# EAGLE board Senior Design Board V2.3 (EAGLE 9.3.2)
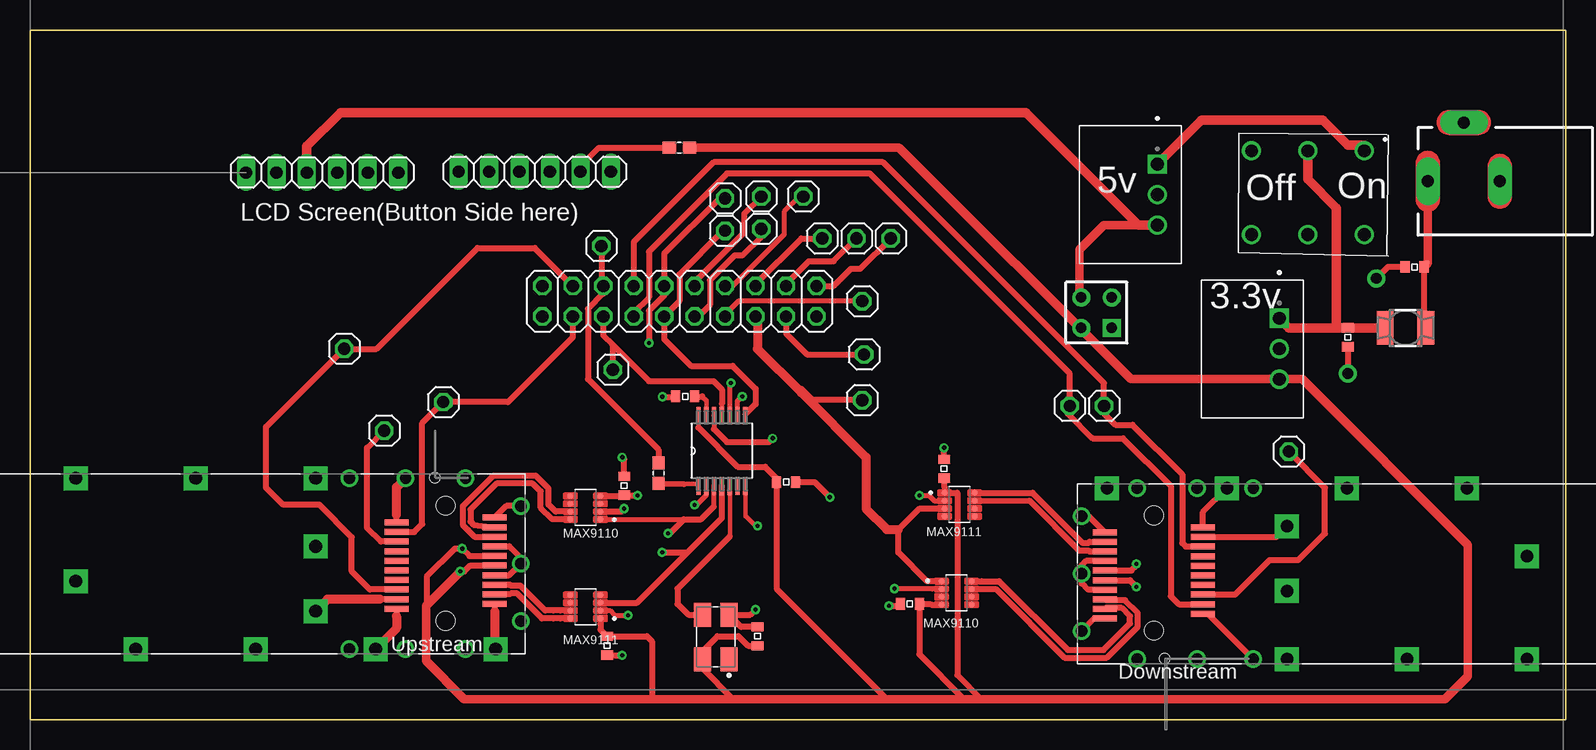
[diagram p0: board, top side]
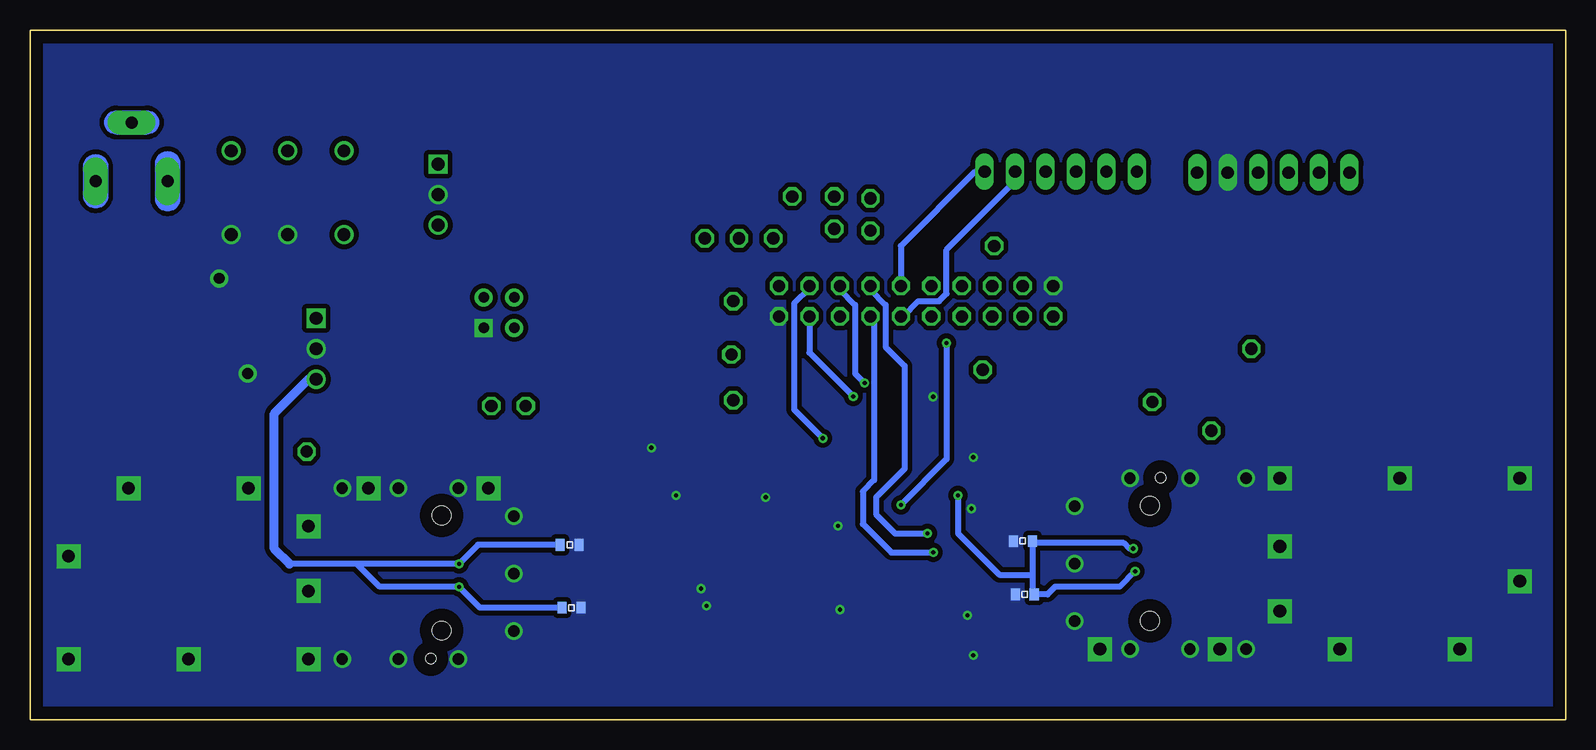
[diagram p1: board, bottom side, seen from below]

Size 128 x 57.5 mm. Coordinates in mm from the lower left corner, seen from the top.
Outline: 0,57.5 0,0 128,0 128,57.5 0,57.5
Copper layers (1*16): Top 0.035mm / dielectric 1.5mm / Bottom 0.035mm
Design rules "default *": minimum track width 10mil, minimum drill 0.61mm, track to track 8mil, track to pad 8mil, pad to pad 8mil, via to via 8mil, smd to smd 8mil, copper to edge 40mil, drill to drill 8mil, minimum pad ring 0mil, minimum via ring 8mil, stop-mask expansion 4mil, vias tented up to drill 14mil, thermal gap 10mil
Net classes: 0 default: width 0.5 mm, clearance 0.15 mm; 1 Diff: width 0.5 mm, clearance 0.127 mm

## Footprints (pad centres in the part's own frame; a part is rotated, then mirrored left to right if it is on the bottom)
0603 = smd 0.762 x 0.965: 1 -0.787,0; 2 0.787,0
0603_C2 = smd 0.762 x 0.965: 1 -0.787,0; 2 0.787,0
0603_C6 = smd 0.762 x 0.965: 1 -0.787,0; 2 0.787,0
0603_C19 = smd 0.762 x 0.965: 1 -0.787,0; 2 0.787,0
1X01 = drill 1.016 pad 1.524 octagon: 1 0,0
4840-2211 = drill 1 pad 2 long: 1 3,1.7; 2 -3,1.7; 3 0,-3.2
HDR-2X2 = drill 0.9 pad 1.5 square: 1 -1.27,-1.27 | drill 0.9 pad 1.5: 2 -1.27,1.27; 3 1.27,-1.27; 4 1.27,1.27
1X06 = drill 1.016 pad 1.524 long: 1 -6.35,0; 2 -3.81,0; 3 -1.27,0; 4 1.27,0; 5 3.81,0; 6 6.35,0
2X10 = drill 1.016 pad 1.524 octagon: 1 -11.43,-1.27; 2 -11.43,1.27; 3 -8.89,-1.27; 4 -8.89,1.27; 5 -6.35,-1.27; 6 -6.35,1.27; 7 -3.81,-1.27; 8 -3.81,1.27; 9 -1.27,-1.27; 10 -1.27,1.27; 11 1.27,-1.27; 12 1.27,1.27; 13 3.81,-1.27; 14 3.81,1.27; 15 6.35,-1.27; 16 6.35,1.27; 17 8.89,-1.27; 18 8.89,1.27; 19 11.43,-1.27; 20 11.43,1.27
MS50 = smd 2.8 x 1.4: 1 0,-1.7; 2 0,1.7
PAD = drill 0.9 pad 1.5: 1 0,0
RESC1608X55 = smd 1.1 x 1: 1 -0.85,0; 2 0.85,0
RESC1608X55_R2 = smd 1.1 x 1: 1 -0.85,0; 2 0.85,0
P137 = drill 1.06 pad 1.59: 2 3.651,5.143; 2_1 3.651,-4.255; 3 -3.334,5.143; 3_1 -3.334,0.444; 3_2 -3.334,-4.255; 3_3 3.651,0.444
SOP65P640X120-14N = smd 1.473 x 0.356: 1 -2.921,1.956; 2 -2.921,1.295; 3 -2.921,0.66; 4 -2.921,0; 5 -2.921,-0.66; 6 -2.921,-1.295; 7 -2.921,-1.956; 8 2.921,-1.956; 9 2.921,-1.295; 10 2.921,-0.66; 11 2.921,0; 12 2.921,0.66; 13 2.921,1.295; 14 2.921,1.956
SOT65P280X145-8N = smd 0.48 x 0.48: 1 -1.255,0.975; 2 -1.255,0.325; 3 -1.255,-0.325; 4 -1.255,-0.975; 5 1.255,-0.975; 6 1.255,-0.325; 7 1.255,0.325; 8 1.255,0.975
CONV_R-78B15-2.0 = drill 1.06 pad 1.59 square: 1 0,0 | drill 1.06 pad 1.59: 2 2.54,0; 3 5.08,0
P159 = smd 2 x 0.5: 1 10.094,3.513; 2 10.094,2.713; 3 10.094,1.913; 4 10.094,1.113; 5 10.094,0.313; 6 10.094,-0.487; 7 10.094,-1.287; 8 10.094,-2.087; 9 10.094,-2.887; 10 10.094,-3.687; 11 18.294,-3.287; 12 18.294,-2.487; 13 18.294,-1.687; 14 18.294,-0.887; 15 18.294,-0.087; 16 18.294,0.713; 17 18.294,1.513; 18 18.294,2.313; 19 18.294,3.113; 20 18.294,3.913 | drill 1.05 pad 2 square: S1 -16.64,7.196; S2 -6.64,7.196; S3 3.36,7.196; S5 18.36,-7.054; S6 8.36,-7.054; S7 -1.64,-7.054; S8 -11.64,-7.054; S9 -16.64,-1.384; S10 3.36,-3.884; S11 3.36,1.516 | drill 0.95 pad 1.458: S12 6.16,7.196; S13 10.86,7.196; S14 15.86,7.196; S15 20.46,4.871; S16 20.46,0.071; S17 20.46,-4.729; S18 15.86,-7.054; S19 10.86,-7.054; S20 6.16,-7.054 | hole 0.85: 13.294,7.243 | hole 1.55: 14.194,4.913; 14.194,-4.687
P17 = smd 2 x 0.5: 1 -13.823,-2.554; 2 -13.823,-1.754; 3 -13.823,-0.954; 4 -13.823,-0.154; 5 -13.823,0.646; 6 -13.823,1.446; 7 -13.823,2.246; 8 -13.823,3.046; 9 -13.823,3.846; 10 -13.823,4.646; 11 -22.023,4.246; 12 -22.023,3.446; 13 -22.023,2.646; 14 -22.023,1.846; 15 -22.023,1.046; 16 -22.023,0.246; 17 -22.023,-0.554; 18 -22.023,-1.354; 19 -22.023,-2.154; 20 -22.023,-2.954 | drill 1.05 pad 2 square: S1 13.164,-6.332; S2 3.164,-6.332; S3 -6.836,-6.332; S5 -21.836,7.918; S6 -11.836,7.918; S7 -1.836,7.918; S8 8.164,7.918; S9 13.164,2.248; S10 -6.836,4.748; S11 -6.836,-0.652 | drill 0.95 pad 1.458: S12 -9.636,-6.332; S13 -14.336,-6.332; S14 -19.336,-6.332; S15 -23.935,-4.007; S16 -23.935,0.793; S17 -23.935,5.593; S18 -19.336,7.918; S19 -14.336,7.918; S20 -9.636,7.918 | hole 0.85: -17.023,-6.284 | hole 1.55: -17.923,-3.954; -17.923,5.646
TWETMCJANF-10.000000 = smd 2 x 1.4: 1 -1.85,-1.1; 2 1.85,-1.1; 3 1.85,1.1; 4 -1.85,1.1

## Placement (x,y rotation side)
C1  .1uf  [0603]  60.64,6.94 270 top
C2  1uF  [0603_C2]  54.61,26.95 180 top
C3  100nF  [0603]  48.1,6.16 90 top
C4  10uF  [0603_C2]  115.42,37.74 0 top
C5  4.7uF  [0603]  109.86,31.88 90 top
C6  100nF  [0603_C6]  63.03,19.8 0 top
C11  100nF  [0603]  76.2,20.91 270 top
C14  100nF  [0603_C2]  73.35,9.64 0 top
C18  100nF  [0603]  49.53,19.49 90 top
C19  100nF  [0603_C19]  45.24,14.88 0 bottom
C20  100nF  [0603_C19]  45.08,10.44 0 bottom
C21  100nF  [0603_C19]  83.02,14.56 0 bottom
C22  100nF  [0603_C19]  82.86,9.33 0 bottom
GPIO_SPARE1  1X01  [1X01]  34.45,26.47 0 top
GPIO_SPARE2  1X01  [1X01]  26.19,30.92 0 top
GPIO_SPARE3  1X01  [1X01]  86.68,26.15 0 top
GPIO_SPARE4  1X01  [1X01]  89.53,26.15 0 top
J1  4840-2211  [4840-2211]  119.52,46.59 180 top
J3  HDR-2X2  [HDR-2X2]  88.9,33.93 90 top
JP3  1X06  [1X06]  24.35,45.62 0 top
JP4  1X06  [1X06]  42.07,45.68 0 top
JP5  2X10  [2X10]  54.13,34.88 0 top
JP10  1X01  [1X01]  29.53,24.09 0 top
JP11  1X01  [1X01]  104.93,22.34 0 top
L1  10uH  [MS50]  114.66,32.66 90 top
PAD63  PAD  [PAD]  109.86,28.85 0 top
PAD80  PAD  [PAD]  112.24,36.79 0 top
R1  1k  [RESC1608X55]  52.39,20.54 270 top
R2  1k  [RESC1608X55_R2]  54.13,47.69 0 top
SW1  DEV_SW1  [P137]  106.97,43.77 90 top
TDC  TDC72007201PW  [SOP65P640X120-14N]  57.68,22.41 90 top
TESTPIN5  1X01  [1X01]  48.58,29.17 0 top
TESTPIN6  1X01  [1X01]  47.62,39.49 0 top
TP9  1X01  [1X01]  57.94,40.76 0 top
TP10  1X01  [1X01]  57.94,43.46 0 top
TP11  1X01  [1X01]  60.96,40.92 0 top
TP12  1X01  [1X01]  60.96,43.62 0 top
TP13  1X01  [1X01]  69.37,34.88 0 top
TP14  1X01  [1X01]  64.45,43.62 0 top
TP15  1X01  [1X01]  69.37,26.63 0 top
TP16  1X01  [1X01]  66.04,40.12 0 top
TP18  1X01  [1X01]  68.9,40.12 0 top
TP20  1X01  [1X01]  71.75,40.12 0 top
TP_17  1X01  [1X01]  69.53,30.44 0 top
U1  MAX9110EKA+T  [SOT65P280X145-8N]  46.31,17.67 180 top
U2  MAX9110EKA+T  [SOT65P280X145-8N]  77.24,10.56 0 top
U3  MAX9111EKA+T  [SOT65P280X145-8N]  46.31,9.41 180 top
U4  MAX9111EKA+T  [SOT65P280X145-8N]  77.49,17.92 0 top
U5  R-78B3.3-2.0  [CONV_R-78B15-2.0]  104.14,33.46 270 top
U6  R-78B3.3-2.0  [CONV_R-78B15-2.0]  93.98,46.31 270 top
U7  DEV_U7  [P159]  20.45,12.92 0 top
U8  DEV_U8  [P17]  111.61,11.37 0 top
U$2  REF_CLK_10MHZ  [TWETMCJANF-10.000000]  57.16,6.89 90 top

## Library data of the parts
C1-C6 C11 C14 C18-C22 GPIO_SPARE1-GPIO_SPARE4 J3 JP3-JP5 JP10 JP11 PAD63 PAD80 SW1 TDC TESTPIN5 TESTPIN6 TP9-TP16 TP18 TP20 TP_17 U3 U4 U7 U8 U$2 = common
J1 = common; DATASHEET: http://datasheets.diptrace.com/con_power/typ_4840.2211.pdf
L1 = common; OC_FARNELL: unknown; OC_NEWARK: unknown
R1 R2 = common; AVAILABILITY: Unavailable; DESCRIPTION: Res Smd 0.047 Ohm 1% 0.4w 0603; MF: Vishay Dale; MP: WSLP0603R0470FEB; PACKAGE: 0603 Vishay Dale; PRICE: None
U1 U2 = common; AVAILABILITY: Unavailable; DESCRIPTION: Single/Dual Lvds Line Driver With u; MF: Maxim Integrated; MP: MAX9110EKA+T; PACKAGE: SOT-23 Maxim Integrated; PRICE: None
U5 U6 = common; AVAILABILITY: Unavailable; DESCRIPTION: Switching Regulator 4.75-32Vin 3.3Vo 2A; MF: Recom Power; MP: R-78B3.3-2.0; PACKAGE: SIP-3 Recom Power; PRICE: None

## Nets
3.3_V: C1.2 C3.2 C6.1 C11.2 C14.2 C18.1 C19.2 C20.2 C21.1 C22.1 J3.2 R2.2 TDC.14 U1.4 U2.4 U3.1 U4.1 U5.3 U7.15 U7.16 U8.15 U8.16 U$2.4
12V: C5.2 L1.2 SW1.3_3 U5.1
+5V: J3.4 JP3.3 U6.3
CLOCK: TDC.5 U$2.3
I2C_SCL: JP4.6 JP5.12 TP12.1
I2C_SDA: JP4.5 JP5.11 R2.1 TP11.1
N$4: C2.1 TDC.13
N$22: C4.2 J1.1 L1.1
NET_0: SW1.2_1 U6.1
NET_35: JP5.20 TP20.1
POWER_GROUND: C1.1 C2.2 C3.1 C4.1 C5.1 C6.2 C11.1 C14.1 C18.2 C19.1 C20.1 C21.2 C22.2 J1.2 J1.3 J3.1 JP3.5 JP5.2 JP5.19 PAD63.1 PAD80.1 SW1.3_1 SW1.3_2 TDC.7 U1.2 U2.2 U3.2 U4.2 U5.2 U6.2 U7.1 U7.9 U7.10 U7.11 U7.14 U7.17 U7.20 U7.S1 U7.S2 U7.S3 U7.S5 U7.S6 U7.S7 U7.S8 U7.S9 U7.S10 U7.S11 U7.S12 U7.S13 U7.S14 U7.S15 U7.S16 U7.S17 U7.S18 U7.S19 U7.S20 U8.1 U8.9 U8.10 U8.11 U8.14 U8.17 U8.20 U8.S1 U8.S2 U8.S3 U8.S5 U8.S6 U8.S7 U8.S8 U8.S9 U8.S10 U8.S11 U8.S12 U8.S13 U8.S14 U8.S15 U8.S16 U8.S17 U8.S18 U8.S19 U8.S20 U$2.2
RD_DOWN_N [Diff]: U4.8 U8.12
RD_DOWN_P [Diff]: U4.7 U8.13
RD_UP_N [Diff]: U3.8 U7.12
RD_UP_P [Diff]: U3.7 U7.13
RX_LOSS_DOWN: GPIO_SPARE4.1 JP5.8 U8.8
RX_LOSS_UP: GPIO_SPARE2.1 JP5.4 U7.8
RX_PULSE: JP5.13 TDC.4 TP13.1 U3.3
SPI_MISO: JP5.17 TDC.9 TP_17.1
SPI_MOSI: JP5.16 TDC.10 TP16.1
SPI_SCK: JP5.18 TDC.12 TP18.1
TD_DOWN_N [Diff]: U2.8 U8.19
TD_DOWN_P [Diff]: U2.7 U8.18
TD_UP_N [Diff]: U1.8 U7.19
TD_UP_P [Diff]: U1.7 U7.18
TDC_CSB: JP5.5 TDC.11 TESTPIN5.1
TDC_ENABLE: R1.2 TDC.1
TDC_ENABLE_1: JP5.6 R1.1 TESTPIN6.1
TDC_INT: JP5.9 TDC.8 TP9.1
TDC_LPBK: JP5.15 TP15.1 U2.1 U4.3
TDC_TRIG: JP5.10 TDC.2 TP10.1
TX_DISABLE_DOWN: JP11.1 U8.3
TX_DISABLE_UP: JP10.1 U7.3
TX_FAULT_DOWN: GPIO_SPARE3.1 JP5.7 U8.2
TX_FAULT_UP: GPIO_SPARE1.1 JP5.3 U7.2
TX_PULSE: JP5.14 TDC.3 TP14.1 U1.1

## Tracks (layer width: path | path; a pad name or v marks a point on that pad's centre or on a via)
3.3_V  (via drill 0.35 pad 0.76)
  Top 0.356: TDC.14 55.72,24.34
  Top 0.48: 76.23,19.39 U4.1 77.31,18.9 | U3.1 47.56,7.95 | U1.4 48.42,18.64 | 75.13,9.58 U2.4
  Top 0.5: U8.16 91.69,11.62 v92.23,11.07 | U8.15 91.83,12.42 92.23,12.82 v92.23,12.98 | U7.16 36.65,13.64 v36.04,14.25 35.4,14.25 33.07,11.92 33.07,9.54 | v35.88,12.34 36.2,12.34 36.69,12.84 U7.15 | C1.2 59.85,6.15 59.05,6.95 57.31,6.95 56.06,5.7 U$2.4 56.06,4.26 58.61,1.71 | C11.2 76.2,19.42 76.23,19.39 | J3.2 87.63,32.5 | 91.76,28.38 U5.3 | 51.84,1.71 51.84,6.54 51.44,6.95 C3.2 47.56,7.49 47.56,7.95 | 48.42,18.64 49.47,18.64 C18.1 50.63,18.7 v50.64,18.69 | 71.44,1.71 62.24,10.9 C6.1 62.24,20.11 61.28,21.07 58.99,21.07 55.72,24.34 | 75.13,9.58 75.06,9.64 C14.2 74.14,5.44 77.87,1.71 | 77.31,18.9 77.31,3.73 79.33,1.71
  Top 0.7: R2.2 72.45,47.69 91.76,28.38 | 91.76,28.38 U5.3 106.05,28.38 119.86,14.56 119.86,3.61 117.95,1.71 79.33,1.71 77.87,1.71 71.44,1.71 58.61,1.71 51.84,1.71 36.2,1.71 33.02,4.88 33.02,9.48 33.07,9.54 v35.88,12.34 | 87.63,32.5 91.76,28.38
  Bottom 0.5: 100.76,12.98 v92.23,12.98 90.65,14.56 C21.1 | 100.76,12.98 106.36,12.98 | 100.76,12.98 98.85,11.07 v92.23,11.07 90.49,9.33 C22.1 | v36.04,14.25 36.35,14.25 36.83,14.72 44.29,14.72 C19.2 44.45,12.08 | v35.88,12.34 37.15,11.07 42.55,11.07 43.18,10.44 C20.2 44.45,10.6 44.45,12.08 | v50.64,18.69 50.64,15.52 47.2,12.08 44.45,12.08
  Bottom 0.762: 106.36,12.98 107.63,14.25 107.63,25.52 104.78,28.38 U5.3
12V
  Top 0.8: L1.2 C5.2 | C5.2 | C5.2 104.93,32.66 U5.1 | SW1.3_3 106.52,45.05 108.9,42.66 108.9,32.66 C5.2
+5V
  Top 0.7: U6.3 89.53,41.23 87.47,39.17 87.47,35.2 J3.4
  Top 0.8: U6.3 92.39,41.23 83.03,50.6 25.88,50.6 23.08,47.81 JP3.3
CLOCK
  Top 0.356: TDC.5 58.34,15.28
  Top 0.5: 58.34,15.28 53.98,10.91 53.98,9.64 54.88,8.74 U$2.3
I2C_SCL
  Top 0.5: TP12.1 59.53,42.19 59.53,40.6 55.4,36.47 JP5.12
  Bottom 0.5: JP4.6 49.21,45.68 55.4,39.49 JP5.12
I2C_SDA
  Top 0.5: JP4.5 45.88,46.16 47.41,47.69 R2.1 | TP11.1 60.96,40.28 59.37,38.7 58.74,38.7 56.67,36.63 56.67,34.57 55.72,33.61 JP5.11
  Bottom 0.5: JP5.11 55.24,33.61 53.98,34.88 52.23,34.88 51.59,35.52 51.59,39.17 45.88,44.89 JP4.5
N$4
  Top 0.356: 56.38,26.61 TDC.13
  Top 0.4: 56.04,26.95 56.38,26.61
  Top 0.5: C2.1 56.04,26.95
N$22
  Top 0.5: C4.2 116.2,32.82 L1.1
  Top 0.7: J1.1 116.52,38.06 C4.2
NET_0
  Top 0.8: SW1.2_1 111.22,47.9 109.86,47.9 107.79,49.97 97.63,49.97 U6.1
NET_35
  Top 0.5: JP5.20 66.99,36.16 68.42,37.58 69.22,37.58 TP20.1
POWER_GROUND  (via drill 0.35 pad 0.76)
  Top 0.356: v60.64,16.15 60.48,16.15 59.69,16.95 59.63,16.95 TDC.7
  Top 0.4: U3.2 48.34,9.09 48.74,8.69 v49.85,8.69 | U2.2 75.21,10.88 75.18,10.91 v72.07,10.91 | v74.14,18.69 74.93,18.69 75.38,18.25 U4.2
  Top 0.48: U1.2 48.42,17.34
  Top 0.5: C6.2 65.41,19.8 v66.67,18.53 | U7.1 30.54,17.07 | U7.10 30.54,8.61 | U7.9 29.16,10.04 | U7.11 38.74,9.01 | U7.S15 39.7,17.8 U7.20 | U7.14 39.95,12.04 U7.S16 41.41,13 39.97,14.44 U7.17 | U8.20 88.73,8.42 U8.S15 | U8.17 88.2,10.82 87.68,11.34 U8.S16 87.68,12.87 88.03,13.22 U8.14 | U8.S17 88.24,16.96 U8.11 | U8.10 97.79,17.3 U8.S6 | U8.9 103.88,15.22 U8.S10 | U8.1 98.2,8.82 U8.S12 | C1.1 59.27,7.73 U$2.2 60.06,8.74 v60.48,9.17 | C3.1 48.1,5.36 v49.37,5.36 | v71.6,9.48 72.4,9.48 C14.1 | C18.2 49.53,21.71 v49.37,21.87 | v52.72,26.92 53.79,26.92 C2.2 | C11.1 v76.2,22.66 | C4.1 113.19,37.74 PAD80.1 | C5.1 PAD63.1 | 48.42,17.34 49.29,17.34 v49.53,17.58
  Top 0.762: 30.54,17.07 30.54,19.36 U7.S13 | 30.54,8.61 30.54,7.61 U7.S6 | 29.16,10.04 24.81,10.04 U7.S10 | 38.74,9.01 38.74,5.94 U7.S5
  pour Bottom (isolate 0.406, no thermals): 0.93,56.57 0.93,0.93 127.07,0.93 127.07,56.57
RD_DOWN_N
  Top 0.5: U4.8 83.57,18.9 87.72,14.74 88.27,14.74 88.34,14.82 U8.12
RD_DOWN_P
  Top 0.5: U4.7 83.3,18.25 87.45,14.09 88.27,14.09 88.34,14.02 U8.13
RD_UP_N
  Top 0.5: U3.8 44.2,8.44 43.64,8.44 42.69,8.44 40.61,10.51 40.07,10.51 39.99,10.44 U7.12
RD_UP_P
  Top 0.5: U3.7 44.2,9.09 43.64,9.09 42.96,9.09 40.88,11.16 40.07,11.16 39.99,11.24 U7.13
RX_LOSS_DOWN
  Top 0.5: U8.8 96.35,14.42 96.04,14.72 96.04,20.44 91.92,24.57 90.49,24.57 89.53,25.52 GPIO_SPARE4.1 89.53,28.06 71.12,46.47 56.99,46.47 50.32,39.81 JP5.8
RX_LOSS_UP
  Top 0.5: U7.8 28.33,10.84 26.83,12.34 26.83,15.2 24.13,17.9 21.11,17.9 19.68,19.33 19.68,24.41 GPIO_SPARE2.1 28.89,30.92 37.31,39.33 42.07,39.33 JP5.4
RX_PULSE  (via drill 0.35 pad 0.76)
  Top 0.4: TP13.1 59.05,34.88 57.78,33.61 JP5.13
  Top 0.5: U3.3 50.61,9.74 54.81,13.93 | 54.81,13.93 57.68,16.8 TDC.4 | v52.7,13.93 54.81,13.93
  Bottom 0.5: JP5.13 57.63,33.61 57.63,19.96 58.58,19.01 58.58,16.31 56.2,13.93 v52.7,13.93
SPI_MISO  (via drill 0.35 pad 0.76)
  Top 0.4: TDC.9 58.97,26.55 v59.37,26.95
  Top 0.5: JP5.17 63.02,32.19 64.77,30.44 TP_17.1
  Bottom 0.5: JP5.17 63.02,30.6 v59.37,26.95
SPI_MOSI  (via drill 0.35 pad 0.76)
  Top 0.4: TDC.10 58.34,27.98 v58.42,28.06
  Top 0.5: JP5.16 60.48,36.31 64.29,40.12 TP16.1
  Bottom 0.5: JP5.16 60.48,35.84 59.21,34.57 59.21,28.85 v58.42,28.06
SPI_SCK  (via drill 0.35 pad 0.76)
  Top 0.4: TDC.12 57.02,24.22
  Top 0.5: 57.02,24.22 58.1,23.14 61.59,23.14 v61.91,23.45 | JP5.18 63.02,36.31 64.93,38.22 66.99,38.22 TP18.1
  Bottom 0.5: JP5.18 63.02,36 64.29,34.73 64.29,25.84 v61.91,23.45
TD_DOWN_N
  Top 0.5: U2.8 79.35,11.53 80.78,11.53 86.52,5.8 89.49,5.8 91.69,8 91.69,8.61 91.01,9.29 89.67,9.29 U8.19
TD_DOWN_P
  Top 0.5: U2.7 79.35,10.88 80.51,10.88 86.25,5.15 89.76,5.15 92.34,7.73 92.34,8.88 91.28,9.94 89.67,9.94 U8.18
TD_UP_N
  Top 0.5: U1.8 43.55,16.69 42.58,17.66 42.58,19.02 41.91,19.68 38.89,19.68 36.72,17.51 36.72,16.5 36.98,16.24 36.99,16.24 U7.19
TD_UP_P
  Top 0.5: U1.7 43.81,17.34 43.23,17.93 43.23,19.29 42.18,20.33 38.62,20.33 36.07,17.78 36.07,16.23 36.52,15.78 37.06,15.24 U7.18
TDC_CSB
  Top 0.356: 57.68,26.32 TDC.11
  Top 0.5: JP5.5 47.78,32.03 48.56,31.25 | 48.56,31.25 51.59,28.22 56.99,28.22 57.68,27.53 57.68,26.32 | 48.56,31.25 48.56,29.19 TESTPIN5.1
TDC_ENABLE
  Top 0.356: 54.48,19.64 55.56,19.64 TDC.1
  Top 0.5: R1.2 54.48,19.64
TDC_ENABLE_1
  Top 0.5: R1.1 52.39,22.5 46.51,28.38 46.51,34.25 47.78,35.52 JP5.6 47.62,36.31 TESTPIN6.1
TDC_INT
  Top 0.356: 59.63,25.46 TDC.8
  Top 0.5: 59.63,25.46 60.48,26.31 60.48,27.58 58.58,29.49 55.09,29.49 52.86,31.71 JP5.9 54.13,34.88 54.13,37.11 57.78,40.76 TP9.1
TDC_LPBK
  Top 0.5: U2.1 74.79,11.53 72.39,13.93 72.39,15.84 74.15,17.6 U4.3 | TP15.1 65.25,26.63 64.29,27.58 64.29,27.27
  Top 0.762: JP5.15 60.64,33.61 60.64,30.92 64.29,27.27 69.69,21.87 69.69,17.58 71.44,15.84 72.39,15.84
TDC_TRIG  (via drill 0.35 pad 0.76)
  Top 0.356: 56.38,18.72 TDC.2
  Top 0.4: 55.56,17.9 56.38,18.72
  Top 0.5: v55.4,17.9 55.56,17.9 | v51.59,31.39 51.59,34.09 52.86,35.36 JP5.10 52.86,38.85 57.47,43.46 TP10.1
  Bottom 0.5: v51.59,31.39 51.59,21.71 v55.4,17.9
TX_DISABLE_DOWN
  Top 0.5: U8.3 100.47,10.42 103.35,13.29 105.73,13.29 107.95,15.52 107.95,19.33 JP11.1
TX_DISABLE_UP
  Top 0.5: U7.3 29.25,14.84 28.1,15.99 28.1,22.66 JP10.1
TX_FAULT_DOWN
  Top 0.5: U8.2 95.75,9.62 95.09,10.28 95.09,19.49 91.12,23.45 88.58,23.45 86.52,25.52 86.52,26.15 GPIO_SPARE3.1 86.68,28.85 70.01,45.52 58.1,45.52 51.59,39.01 51.59,35.2 50.32,33.93 JP5.7
TX_FAULT_UP
  Top 0.5: JP5.3 45.24,31.87 39.85,26.47 GPIO_SPARE1.1 32.7,24.73 32.7,16.31 32.03,15.64 U7.2
TX_PULSE  (via drill 0.35 pad 0.76)
  Top 0.4: U1.1 54.52,16.69 | 57.02,17.77 TDC.3 | TP14.1 64.14,43.62 62.87,42.35 62.87,40.44 58.58,36.16 JP5.14
  Top 0.5: 57.02,17.77 55.94,16.69 54.52,16.69 53.34,15.52 v53.18,15.52
  Bottom 0.5: JP5.14 57.94,35.84 56.67,34.57 56.67,31.07 55.09,29.49 55.09,20.91 57.47,18.53 57.47,17.11 55.88,15.52 v53.18,15.52

## Text on the board
tPlace: 5v | Off | On | LCD Screen(Button Side here) | 3.3v | MAX9111 | MAX9110 | MAX9110 | MAX9111